# Altium PCB PCB1.PcbDoc
Units mil, origin at the board's own origin, x right, y up, seen from the top; angles counter-clockwise.
Board outline 6000 x 4000 mil, 2 copper layers (Top Layer, Bottom Layer); 19 components, 11 nets, 41 pads, 0 vias.
Unrouted connection lines stored in the file: 19.
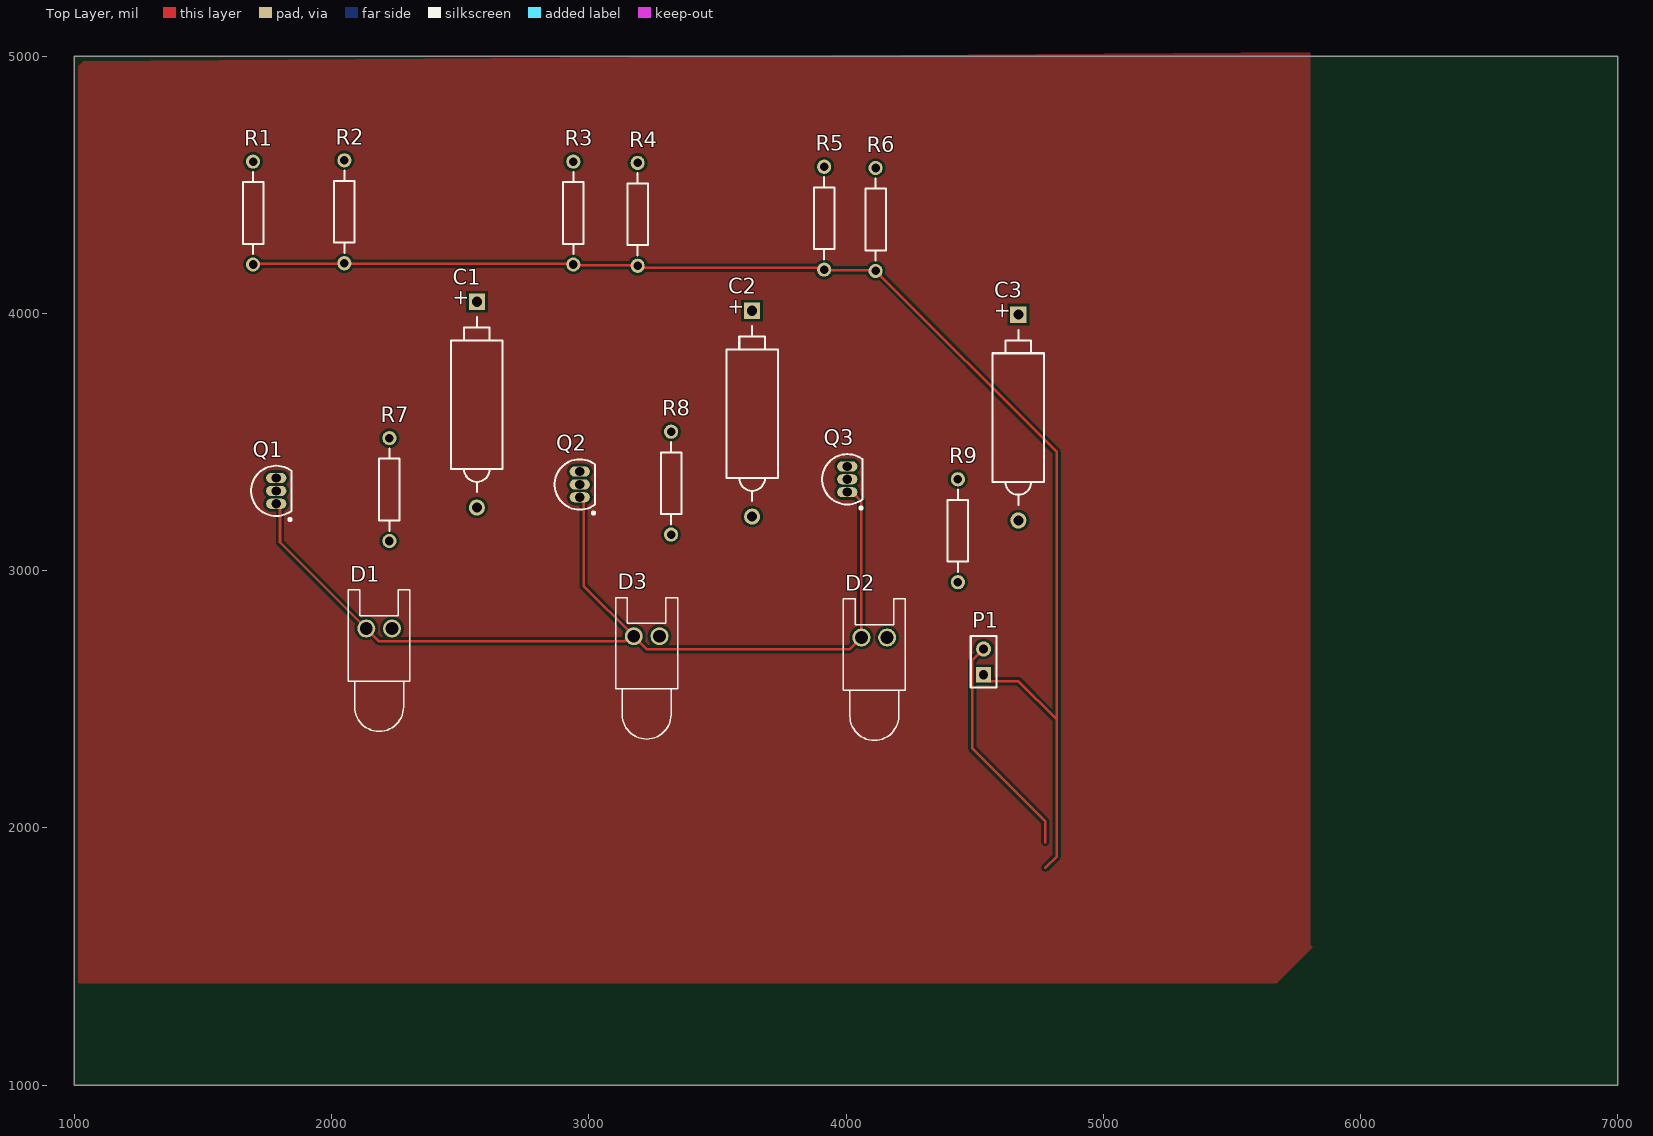
[diagram p0: Top Layer view]
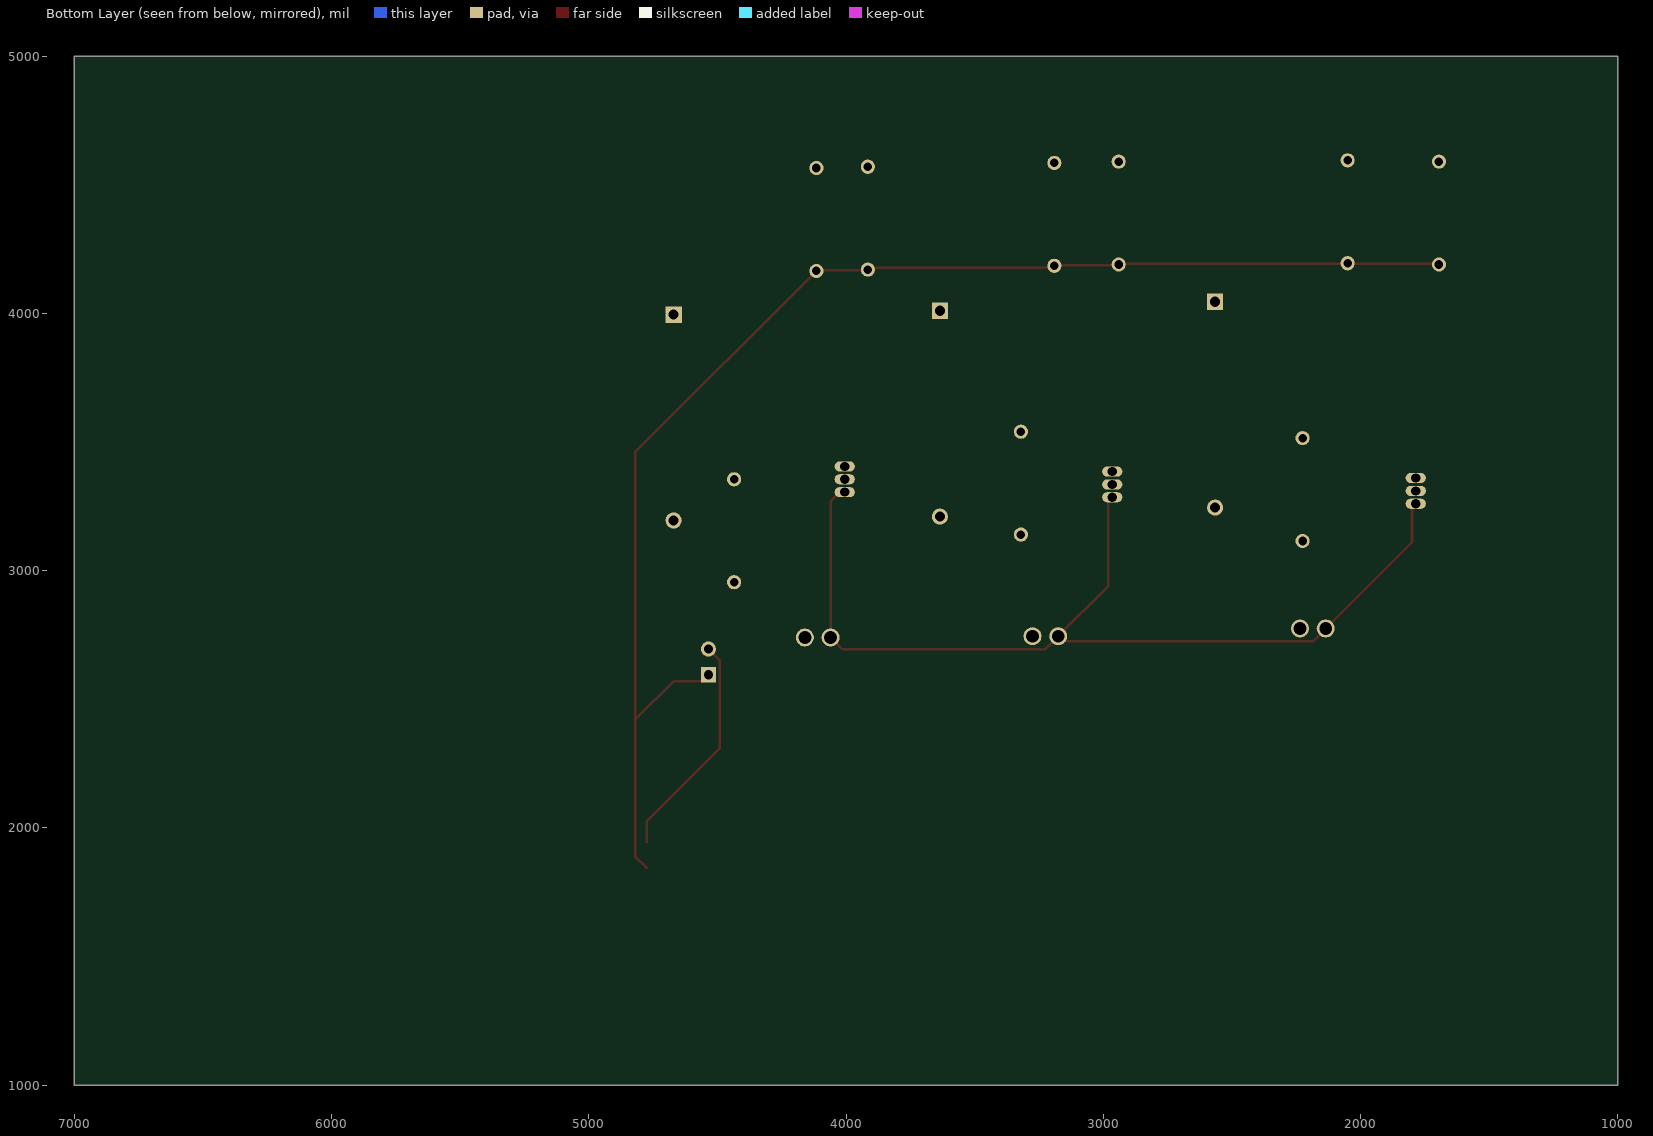
[diagram p1: Bottom Layer view, seen from below]

## Layer stack, top to bottom
Top Solder: solder mask 0.4, Solder Resist, Dk 3.5
Top Layer: signal copper 1.4
Dielectric 1: dielectric 12.6, FR-4, Dk 4.8
Bottom Layer: signal copper 1.4
Bottom Solder: solder mask 0.4, Solder Resist, Dk 3.5

## Board outline
1000,1000 7000,1000 7000,5000 1000,5000

## Design rules (kind name [scope] priority, off if disabled: settings)
Clearance [All] p1: gap=10 ignorepadtopadclearanceinfootprint=FALSE except(0: Arc-Hole Track-Hole SMDPad-Hole THPad-Hole Via-Hole Fill-Hole Poly-Hole Region-Hole Text-Hole)
PolygonConnect [All] p1: connectstyle=Relief reliefconductorwidth=10 reliefentries=4 polygonreliefangle="90 Angle" airgapwidth=10
RoomDefinition 跑马灯 [InComponentClass('跑马灯')] p1: confinementstyle=ConfineIn formatcopy=TRUE outline 1010,1005 6995,1005 6995,5020 1010,5020
RoutingVias [All] p1: holewidth=28 width=50 viastyle="Through Hole" minholewidth=28 minwidth=50 maxholewidth=28 maxwidth=50
SolderMaskExpansion [All] p1: expansion=4
Width [All] p1: maxlimit=10 minlimit=10 preferedwidth=10
30 further rules are at their usual default settings.

## Components (designator, comment, footprint, x,y, rotation, side; value= is the part's Value field where it differs from the comment)
C1 "Cap Pol2" POLAR0.8 2565,3645 r90 top value=100pF
C2 "Cap Pol2" POLAR0.8 3635,3610 r90 top value=100pF
C3 "Cap Pol2" POLAR0.8 4670,3595 r90 top value=100pF
D1 "LED0" LED-0 2185,2775 r0 top
D2 "LED0" LED-0 4110,2740 r0 top
D3 "LED0" LED-0 3225,2745 r0 top
P1 "Header 2" HDR1X2 4535,2595 r90 top
Q1 "2N3904" TO-92A 1785,3310 r0 top
Q2 "2N3904" TO-92A 2965,3335 r0 top
Q3 "2N3904" TO-92A 4005,3355 r0 top
R1 "Res2" AXIAL-0.4 1695,4390 r90 top value=1K
R2 "Res2" AXIAL-0.4 2050,4395 r90 top value=1K
R3 "Res2" AXIAL-0.4 2940,4390 r90 top value=1K
R4 "Res2" AXIAL-0.4 3190,4385 r90 top value=1K
R5 "Res2" AXIAL-0.4 3915,4370 r90 top value=1K
R6 "Res2" AXIAL-0.4 4115,4365 r90 top value=1K
R7 "Res2" AXIAL-0.4 2225,3315 r90 top value=1K
R8 "Res2" AXIAL-0.4 3320,3340 r90 top value=1K
R9 "Res2" AXIAL-0.4 4435,3155 r90 top value=1K

## Footprints (in the part's own frame and the unit in brackets; to place one, negate y for a bottom-side part, rotate by r counter-clockwise, add the part's x,y. Pads: shape width x height; smd on the part's side, far side on the other; paste and mask are expansions set on the pad)
AXIAL-0.4 [mm] "Axial Device, Thru-Hole; 2 Leads; 0.4 in Pin Spacing"
  round 1.4 hole 0.85: 1(-5.08,0) 2(5.08,0)
  silkscreen extent -4.06,-1.02 4.06,1.02
HDR1X2 [mm] "Connector; Header; 2 Position"
  rect 1.5x1.5 hole 0.9: 1(0,0)
  round 1.5 hole 0.9: 2(2.54,0)
  silkscreen extent -1.27,-1.27 3.81,1.27
LED-0 [mil] "LED; 2 Leads"
  round 70 hole 50: 1(50,0) 2(-50,0)
  silkscreen extent -120,-400 120,150
POLAR0.8 [mm] "Polarized Capacitor; 2 Leads"
  rect 1.6x1.6 hole 1: 1(10.16,0)
  round 1.6 hole 1: 2(-10.16,0)
  silkscreen extent -8.64,-2.54 8.64,2.54
TO-92A [mm] "TO, Flat Index; 3 In-Line, Axial Leads; Body Dia. 4.5mm; Leads 0.51 x 0.48 mm (max)"
  oval 2x1 hole 0.9: 1(0,-1.27) 2(0,0) 3(0,1.27)
  silkscreen extent -2.48,-2.95 1.5,2.48, body extent -2.48,-2.5 1.5,2.5, height 6.86

## Part data
C1 C2 C3: "Polarized Capacitor (Axial)", LatestRevisionDate=17-Jul-2002, LatestRevisionNote="Re-released for DXP Platform.", PackageDescription="Polarized Capacitor; 2 Leads", PackageReference=POLAR0.8, Published=8-Jun-2000, Publisher="Altium Limited"
D1 D2 D3: "Typical INFRARED GaAs LED", LatestRevisionDate=08-Jul-2005, LatestRevisionNote="Mech Layer 1 removed.", PackageDescription="LED; 2 Leads", PackageReference=LED-0, Published=8-Jun-2000, Publisher="Altium Limited"
P1: "Header, 2-Pin", LatestRevisionDate=17-Jul-2002, LatestRevisionNote="Re-released for DXP Platform.", Publisher="Altium Limited"
Q1 Q2 Q3: "NPN General Purpose Amplifier", ComponentLink1Description="Manufacturer Link", ComponentLink1URL=http://www.fairchildsemi.com/, ComponentLink2Description=Datasheet, ComponentLink2URL=http://www.fairchildsemi.com/ds/2N%2F2N3904.pdf, DatasheetVersion=1997, LatestRevisionDate=15-Jan-2003, LatestRevisionNote="PCB Footprint 'BCY-W3/D4.7' replaced", PackageDescription="TO, Flat Index; 3 In-Line, Axial Leads; Body Dia. 4.5mm; Leads 0.51 x 0.48 mm (max)", PackageReference=TO-92A, PackageVersion=Sep-1998, Published=8-Jun-2000, Publisher="Altium Limited"
R1 R2 R3 R4 R5 R6 R7 R8 R9: "Resistor", LatestRevisionDate=17-Jul-2002, LatestRevisionNote="Re-released for DXP Platform.", PackageDescription="Axial Device, Thru-Hole; 2 Leads; 0.4 in Pin Spacing", PackageReference=AXIAL-0.4, Published=8-Jun-2000, Publisher="Altium Limited"

## Nets (pads, with @x,y where several pads share a name; then routed paths per layer and width w, separated by ;. In a path a pad name is that pad's centre, name@x,y a point inside that pad or via, vN(x,y) a via of type N, cw(c..) or ccw(c..) an arc to the next point about the centre after c; other vN are vias at no path point)
GND: D1.2 D2.2 D3.2 P1.2 Q1.1 Q2.1 Q3.1 | length 4736.4
  Top Layer w10: Q1.1 1786.12,3260 1799.69,3246.43 1799.69,3110.31 D1.2 2185,2725 3138.76,2725 3158.76,2745 D3.2 ; Q2.1 2966.12,3285 2979.69,3271.43 2979.69,2940.31 D3.2 ; Q3.1 4023.3,3305 4060,3268.3 D2.2 4015,2695 3225,2695 D3.2 ; P1.2 4490.47,2650.47 4490.47,2309.53 4775,2025 4775,1945
NetC1_2: C1.2 Q2.2 R3.2
NetC2_2: C2.2 Q3.2 R5.2
NetC3_2: C3.2 Q1.2 R1.2
NetD1_1: D1.1 R7.2
NetD2_1: D2.1 R8.2
NetD3_1: D3.1 R9.2
OUT1: C1.1 Q1.3 R2.2 R7.1
OUT2: C2.1 Q2.3 R4.2 R8.1
OUT3: C3.1 Q3.3 R6.2 R9.1
VCC: P1.1 R1.1 R2.1 R3.1 R4.1 R5.1 R6.1 | length 5421.6
  Top Layer w10: R1.1 1697.5,4192.5 2047.5,4192.5 R2.1 2052.5,4192.5 2937.5,4192.5 R3.1 2942.5,4187.5 3187.5,4187.5 R4.1 3197.5,4177.5 3907.5,4177.5 R5.1 3917.5,4167.5 4112.5,4167.5 R6.1 4819.53,3460.47 4819.53,2420.47 ; P1.1 4559.53,2570.47 4669.53,2570.47 4819.53,2420.47 ; 4775,1845 4819.53,1889.53 4819.53,2420.47

## Polygon pours and split planes (outlines as drawn)
no net on Top Layer (solid, pour order 0): 1035,4980 1015,4960 1015,1395 5675,1395 5815,1535 5805,1545 5805,5015

## Text inside footprints (layer, text, board x,y; h text height)
C1: Top Overlay "+" at 2527.6,4025 h59.06 r90
C2: Top Overlay "+" at 3597.6,3990 h59.06 r90
C3: Top Overlay "+" at 4632.6,3975 h59.06 r90